# Altium PCB PCB_STM32.PcbDoc
Units mm, origin at the board's own origin, x right, y up, seen from the top; angles counter-clockwise.
Board outline 152.4 x 101.6 mm, 2 copper layers (Top Layer, Bottom Layer); 35 components, 49 nets, 180 pads, 0 vias.
Unrouted connection lines stored in the file: 125.
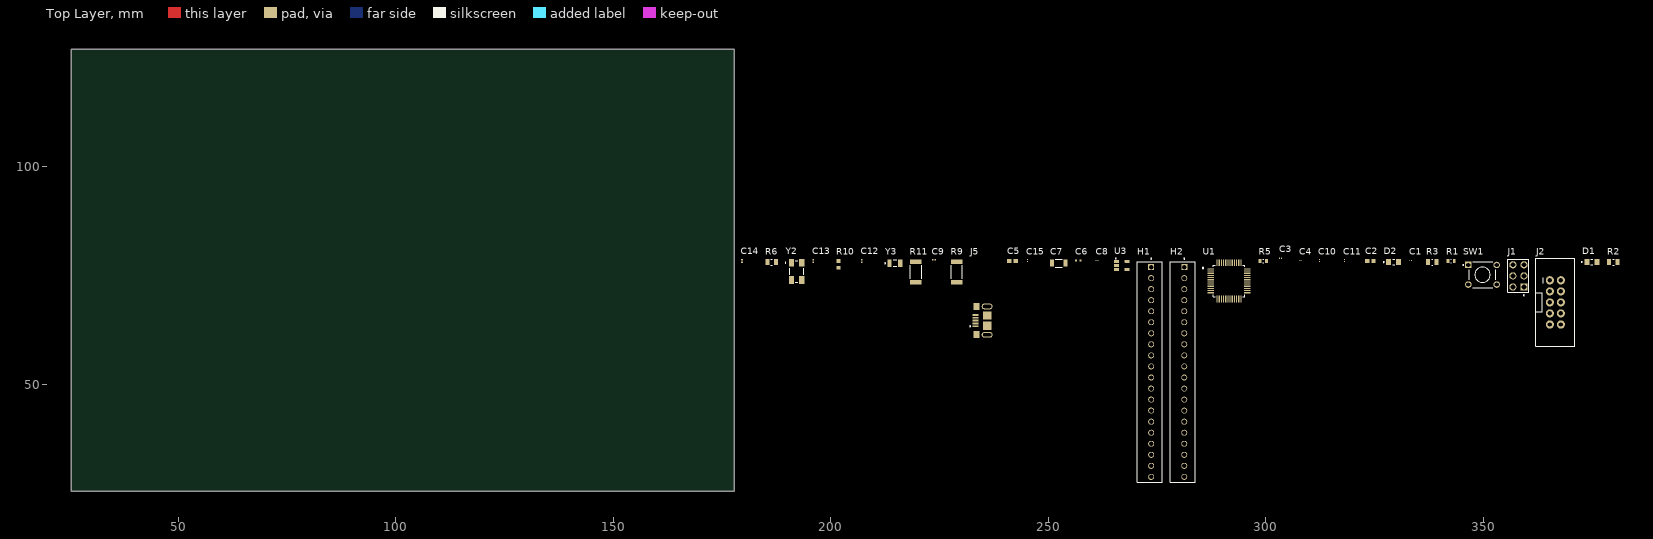
[diagram p0: Top Layer view]
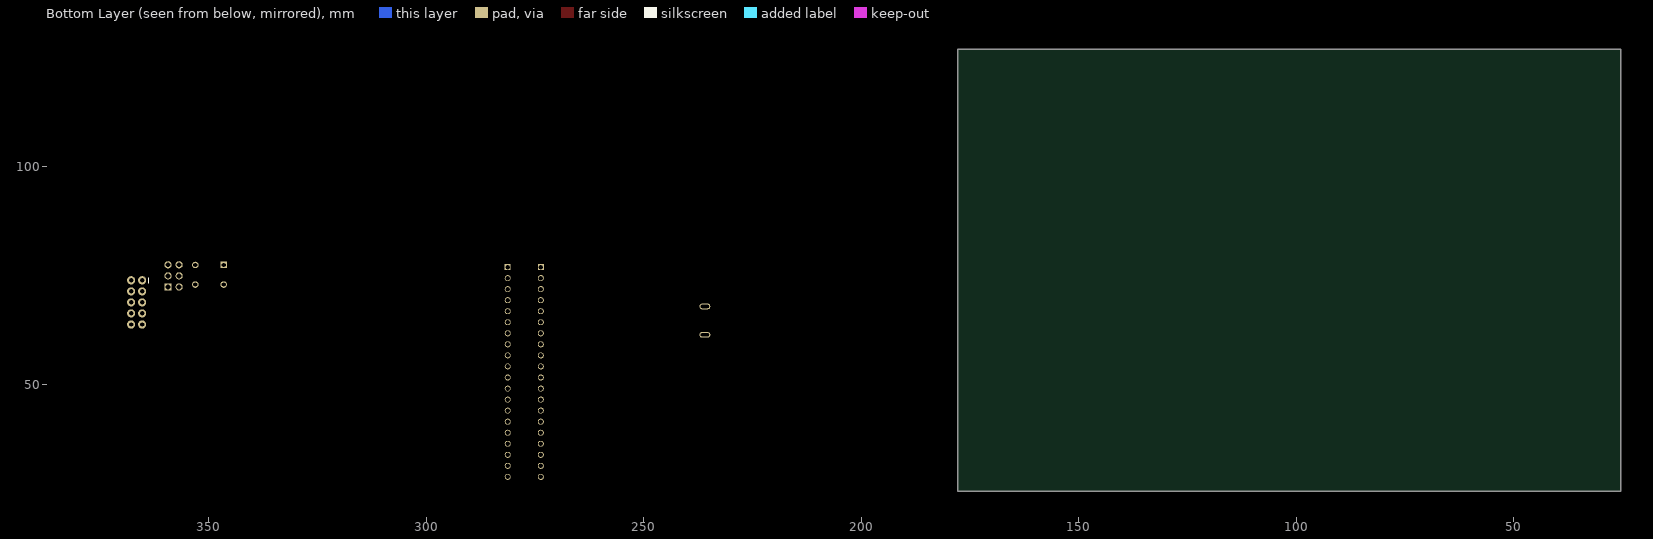
[diagram p1: Bottom Layer view, seen from below]

## Layer stack, top to bottom
Top Solder: solder mask 0.0102, Solder Resist, Dk 3.5
Top Layer: signal copper 0.0356
Dielectric 1: dielectric 0.32, FR-4, Dk 4.8
Bottom Layer: signal copper 0.0356
Bottom Solder: solder mask 0.0102, Solder Resist, Dk 3.5

## Board outline
25.4,25.4 177.8,25.4 177.8,127 25.4,127

## Design rules (kind name [scope] priority, off if disabled: settings)
Clearance [All] p1: gap=0.254 ignorepadtopadclearanceinfootprint=FALSE
PolygonConnect [All] p1: connectstyle=Relief reliefconductorwidth=0.254 reliefentries=4 polygonreliefangle="90 Angle" airgapwidth=0.254
RoutingVias [All] p1: holewidth=0.711 width=1.27 viastyle="Through Hole" minholewidth=0.711 minwidth=1.27 maxholewidth=0.711 maxwidth=1.27
SolderMaskExpansion [All] p1: expansion=0.102 istentingtop=FALSE
SupplyNets "Schematic Supply Nets_3" [InNet('GND')] p1: voltage=0.000
SupplyNets "Schematic Supply Nets_2" [InNet('3.3VCC')] p2: voltage=0.000
SupplyNets "Schematic Supply Nets_1" [InNet('+5')] p3: voltage=0.000
SupplyNets "Schematic Supply Nets" [InNet('VCC')] p4: voltage=0.000
Width [All] p1: maxlimit=0.254 minlimit=0.254 preferedwidth=0.254
30 further rules are at their usual default settings.

## Components (designator, comment, footprint, x,y, rotation, side; value= is the part's Value field where it differs from the comment)
C1 "100nF" WCAP-CSGP_0201_L0.6W0.3H0.3 333.375,78.486 r0 top
C2 "1uF" CAPC1608X55N 324.104,78.359 r0 top
C3 "100nF" WCAP-CSGP_0201_L0.6W0.3H0.3 303.437,78.994 r0 top
C4 "100nF" WCAP-CSGP_0201_L0.6W0.3H0.3 308.102,78.486 r0 top
C5 "1uF" CAPC1608X55N 241.808,78.359 r0 top
C6 "10μF" WCAP-CSGP_0402_L1W0.5H0.5 256.921,78.486 r0 top
C7 "22nF" WCAP-CSGP_1206_L3.2W1.6H1.6 252.476,77.851 r0 top
C8 "100nF" WCAP-CSGP_0201_L0.6W0.3H0.3 261.239,78.486 r0 top
C9 "20p" CAPC0603X33N 223.774,78.613 r0 top
C10 "100nF" WCAP-CSGP_0201_L0.6W0.3H0.3 312.42,78.486 r90 top
C11 "100nF" WCAP-CSGP_0201_L0.6W0.3H0.3 318.135,78.486 r90 top
C12 "20p" CAPC0603X33N 207.137,78.359 r90 top
C13 "20p" CAPC0603X33N 195.961,78.359 r90 top
C14 "20p" CAPC0603X33N 179.578,78.359 r90 top
C15 "100nF" WCAP-CSGP_0201_L0.6W0.3H0.3 245.237,78.486 r90 top
D1 "7012X1" LED_7012X1 375.031,78.105 r0 top
D2 "7012X1" LED_7012X1 329.438,78.105 r0 top
H1 "Header 20" TE_2-640456-0 273.685,76.962 r90 top
H2 "Header 20" TE_2-640456-0 281.305,76.962 r90 top
J1 "67997-106HLF" AMPHENOL_67997-106HLF 358.14,74.93 r90 top
J2 "SWD" ARM-JTAG-10-SWD-IDC 366.649,68.834 r0 top
J5 "2013499-1" TE_2013499-1 235.966,64.643 r90 top
R1 "ERJPA3F5100V" RES_ERJPA3F5100V 342.646,78.359 r0 top
R2 "10k" RESC2012X60N 379.984,78.105 r0 top
R3 "100k" RESC2012X60N 338.328,78.105 r0 top
R5 "ERJPA3F5100V" RES_ERJPA3F5100V 299.466,78.359 r0 top
R6 "1M" RESC2012X60N 186.436,78.105 r0 top
R9 "20R" RESC5025X120N 228.981,75.819 r90 top
R10 "4k7" RESC1608X55N 201.803,77.597 r90 top
R11 "20R" RESC5025X120N 219.583,75.819 r90 top
SW1 "1825910-6" SW_1825910-6-4 349.885,75.184 r0 top
U1 "STM32F103C8T6" QFP50P900X900X160-48N 291.592,73.787 r0 top
U3 "RT9193-33GB" SOT94P279X129-5N 266.954,77.343 r0 top
Y2 "8MHz" XTAL_ABM3B-8.000MHZ-10-1-U-T 192.151,75.946 r0 top
Y3 "32.768K" XTAL_NX3215SA-32.768K-STD-MUA-14 214.757,77.851 r0 top

## Footprints (in the part's own frame and the unit in brackets; to place one, negate y for a bottom-side part, rotate by r counter-clockwise, add the part's x,y. Pads: shape width x height; smd on the part's side, far side on the other; paste and mask are expansions set on the pad)
AMPHENOL_67997-106HLF [mm]
  rect 1.65x1.65 hole 1.1: 01(-2.54,-1.27)
  round 1.65 hole 1.1: 02(-2.54,1.27) 03(0,-1.27) 04(0,1.27) 05(2.54,-1.27) 06(2.54,1.27)
  silkscreen extent -4.56,-2.41 3.81,2.41, body extent -3.81,-2.41 3.81,2.41, height 8.38
ARM-JTAG-10-SWD-IDC [mil]
  round 74 hole 40: GND@1(-50,100) GND@2(-50,0) GND@3(-50,-200) RESET(50,-200) RXI(-50,-100) SWCLK(50,100) SWDIO(50,200) SWO(50,0) TXO(50,-100) VREF(-50,200)
  silkscreen extent -177,-398 177,398
CAPC0603X33N [mm]
  rect 0.38x0.4 smd: 1(-0.281,0) 2(0.281,0)
  body extent -0.3,-0.15 0.3,0.15, height 0.33
CAPC1608X55N [mm]
  rect 1.01x0.93 smd: 1(-0.709,0) 2(0.709,0)
  body extent -0.8,-0.4 0.8,0.4, height 0.55
LED_7012X1 [mm]
  rect 1.15x1.3 smd: A(1.125,0) C(-1.125,0)
  silkscreen extent -2.4,-0.63 0.23,0.63, body extent -0.62,-1 0.62,1, height 0.73
QFP50P900X900X160-48N [mm]
  rrect50% 1.56x0.28 smd: 1(-4.18,2.75) 2(-4.18,2.25) 3(-4.18,1.75) 4(-4.18,1.25) 5(-4.18,0.75) 6(-4.18,0.25) 7(-4.18,-0.25) 8(-4.18,-0.75) 9(-4.18,-1.25) 10(-4.18,-1.75) 11(-4.18,-2.25) 12(-4.18,-2.75) 25(4.18,-2.75) 26(4.18,-2.25) 27(4.18,-1.75) 28(4.18,-1.25) 29(4.18,-0.75) 30(4.18,-0.25) 31(4.18,0.25) 32(4.18,0.75) 33(4.18,1.25) 34(4.18,1.75) 35(4.18,2.25) 36(4.18,2.75)
  rrect50% 0.28x1.56 smd: 13(-2.75,-4.18) 14(-2.25,-4.18) 15(-1.75,-4.18) 16(-1.25,-4.18) 17(-0.75,-4.18) 18(-0.25,-4.18) 19(0.25,-4.18) 20(0.75,-4.18) 21(1.25,-4.18) 22(1.75,-4.18) 23(2.25,-4.18) 24(2.75,-4.18) 37(2.75,4.18) 38(2.25,4.18) 39(1.75,4.18) 40(1.25,4.18) 41(0.75,4.18) 42(0.25,4.18) 43(-0.25,4.18) 44(-0.75,4.18) 45(-1.25,4.18) 46(-1.75,4.18) 47(-2.25,4.18) 48(-2.75,4.18)
  silkscreen extent -6.15,-3.6 3.6,3.6, body extent -4.5,-4.5 4.5,4.5, height 1.6
RES_ERJPA3F5100V [mm]
  rect 0.65x0.9 smd: 1(-0.725,0) 2(0.725,0)
  silkscreen extent -0.08,-0.4 0.08,0.4, body extent -0.8,-0.4 0.8,0.4, height 0.45
RESC1608X55N [mm]
  rect 0.87x0.97 smd: 1(-0.78,0) 2(0.78,0)
  body extent -0.8,-0.4 0.8,0.4, height 0.55
RESC2012X60N [mm]
  rect 0.92x1.38 smd: 1(-0.955,0) 2(0.955,0)
  silkscreen extent -0.17,-0.68 0.17,0.68, body extent -1,-0.63 1,0.63, height 0.6
RESC5025X120N [mm]
  rect 1.07x2.67 smd: 1(-2.38,0) 2(2.38,0)
  silkscreen extent -1.52,-1.32 1.52,1.32
SOT94P279X129-5N [mm]
  rrect12% 1.17x0.67 smd: 1(-1.22,0.94) 2(-1.22,0) 3(-1.22,-0.94) 4(1.22,-0.94) 5(1.22,0.94)
  silkscreen extent -1.47,1.53 -1.33,1.67, body extent -1.4,-1.45 1.4,1.45, height 1.3
SW_1825910-6-4 [mm]
  rect 1.498x1.498 / inner round 1.498 / far side rect 1.498x1.498 hole 0.99: 1(-3.25,2.25)
  round 1.498 hole 0.99: 2(3.25,2.25) 3(-3.25,-2.25) 4(3.25,-2.25)
  silkscreen extent -4.54,-3 3,3, body extent -3,-3.9 3,3.9, height 5.01
TE_2-640456-0 [mm]
  rect 1.37x1.37 / inner round 1.37 / far side rect 1.37x1.37 hole 1.02: 1(0,0)
  round 1.37 hole 1.02: 2(-2.54,0) 3(-5.08,0) 4(-7.62,0) 5(-10.16,0) 6(-12.7,0) 7(-15.24,0) 8(-17.78,0) 9(-20.32,0) 10(-22.86,0) 11(-25.4,0) 12(-27.94,0) 13(-30.48,0) 14(-33.02,0) 15(-35.56,0) 16(-38.1,0) 17(-40.64,0) 18(-43.18,0) 19(-45.72,0) 20(-48.26,0)
  silkscreen extent -49.53,-2.54 2.02,3.18, body extent -49.53,-2.54 1.27,3.17, height 10.03
TE_2013499-1 [mm]
  rect 0.4x1.35 smd: 1(-1.3,2.675) 2(-0.65,2.675) 3(0,2.675) 4(0.65,2.675) 5(1.3,2.675)
  rect 1.6x1.4 smd: SH1(-3.2,2.45) SH4(3.2,2.45)
  rect 1.9x1.9 smd: SH2(-1.2,0) SH3(1.2,0)
  oval 1.31x2.5 hole 0.71 slot 1.9 at 90 deg: SH5(3.255,0) SH6(-3.255,0)
  silkscreen extent -1.4,3.8 -1.2,4, body extent -4,-2.49 4,3.11, height 2.76
WCAP-CSGP_0201_L0.6W0.3H0.3 [mm] "Ceramic Capacitors, body 0.60x0.30mm"
  rect 0.21x0.3 smd: 1(-0.22,0) 2(0.22,0)
  body extent -0.3,-0.15 0.3,0.15, height 0.3
WCAP-CSGP_0402_L1W0.5H0.5 [mm] "Ceramic Capacitors, body 1x0.5mm"
  rect 0.5x0.5 smd: 1(-0.5,0) 2(0.5,0)
  body extent -0.5,-0.25 0.5,0.25, height 0.5
WCAP-CSGP_1206_L3.2W1.6H1.6 [mm] "Ceramic Capacitors, body 3.2x1.6mm"
  rect 0.9x1.6 smd: 1(-1.55,0) 2(1.55,0)
  silkscreen extent -0.8,-0.95 0.8,0.95, body extent -1.6,-0.8 1.6,0.8, height 1.6
XTAL_ABM3B-8.000MHZ-10-1-U-T [mm]
  rect 1.2x1.8 smd: 1(-1.2,2) 2(-1.2,-2) 3(1.2,-2) 4(1.2,2)
  silkscreen extent -2.65,-2.5 1.6,2.5, body extent -1.58,-2.5 1.6,2.5, height 1.1
XTAL_NX3215SA-32.768K-STD-MUA-14 [mm]
  rect 1x1.8 smd: 1(-1.25,0) 2(1.25,0)
  silkscreen extent -2.35,-0.75 0.43,0.75

## Part data
C1 C3 C4 C8 C10 C11: library part C2012X7R1H104K085AA, "0.1 ÂµF Â±10% 50V Ceramic Capacitor X7R 0805 (2012 Metric)", Package="2012 TDK", Check_prices=https://www.snapeda.com/parts/C2012X7R1H104K085AA/TDK/view-part/?ref=eda, Digi-Key_Part_Number=445-7534-1-ND, MF=TDK, MP=C2012X7R1H104K085AA, Purchase-URL=https://pricing.snapeda.com/search/part/C2012X7R1H104K085AA/?ref=eda, SnapEDA_Link=https://www.snapeda.com/parts/C2012X7R1H104K085AA/TDK/view-part/?ref=snap
C2 C5: library part CGB3B3X6S1A105K055AB, "Cap Ceramic 1uF 10V X6S 10% SMD 0603 105Â°C Punched Paper T/R", Package="1608 TDK", Check_prices=https://www.snapeda.com/parts/CGB3B3X6S1A105K055AB/TDK/view-part/?ref=eda, MF=TDK, MP=CGB3B3X6S1A105K055AB, SnapEDA_Link=https://www.snapeda.com/parts/CGB3B3X6S1A105K055AB/TDK/view-part/?ref=snap
C6: library part C2012X5R1C106M085AC, "10ÂµF Â±20% 16V Ceramic Capacitor X5R 0805 (2012 Metric)", Package="2012 TDK", Availability="In Stock", Check_prices=https://www.snapeda.com/parts/C2012X5R1C106M085AC/TDK/view-part/?ref=eda, MF=TDK, MP=C2012X5R1C106M085AC, Price=None, Purchase-URL=https://pricing.snapeda.com/search/part/C2012X5R1C106M085AC/?ref=eda, SnapEDA_Link=https://www.snapeda.com/parts/C2012X5R1C106M085AC/TDK/view-part/?ref=snap
C7: library part 885012008009, "WCAP-CSGP Multilayer Ceramic Chip Capacitor, General Purpose, size 1206, NP0, 22nF, 10V", Capacitance Tolerance=+/-5%, Case/Size Code=1206, Insulation Resistance=10GΩ, Manufacturer="Wurth Elektronik", Max Operating Temperature=125°C, Min Operating Temperature=-55°C, Rated Voltage (DC)=10V, Capacitance=22nF, Category="Multilayer Ceramic Chip Capacitors", Ceramic Type=NP0, ComponentLink1Description="Website Link", ComponentLink1URL=https://www.we-online.com/redexpert/article/885012008009?ad, ComponentLink2Description="Datasheet Link", ComponentLink2URL=https://www.we-online.com/redexpert/spec/885012008009?ad, Height=1.6mm, Length=3.2mm, Manufacturer Part Number=885012008009, Match Code=WCAP-CSGP, Mount="Surface Mount", Packaging="Tape and Reel", Q Factor=1000, Technical Reference=NP01206223J010DFCT10000, Width=1.6mm
C9 C12 C13 C14: library part GRM0335C1H200JA01D, "SMD capacitor C0G(EIA) with capacitance 20pF Tol.5%. Rated voltage 50Vdc 125C", Package="0603 Murata", Check_prices=https://www.snapeda.com/parts/GRM0335C1H200JA01D/Murata+Electronics+North+America/view-part/?ref=eda, MF="Murata Electronics", MP=GRM0335C1H200JA01D, SnapEDA_Link=https://www.snapeda.com/parts/GRM0335C1H200JA01D/Murata+Electronics+North+America/view-part/?ref=snap
C15: library part 885012104001, "WCAP-CSGP Multilayer Ceramic Chip Capacitor, General Purpose, size 0201, X5R Class II, 100nF, 16V", Capacitance Tolerance=+/-10%, Case/Size Code=0201, Insulation Resistance=1GΩ, Manufacturer="Wurth Elektronik", Max Operating Temperature=85°C, Min Operating Temperature=-55°C, Rated Voltage (DC)=16V, Capacitance=100nF, Category="Multilayer Ceramic Chip Capacitors", Ceramic Type="X5R Class II", ComponentLink1Description="Website Link", ComponentLink1URL=https://www.we-online.com/redexpert/article/885012104001?ad, ComponentLink2Description="Datasheet Link", ComponentLink2URL=https://www.we-online.com/redexpert/spec/885012104001?ad, Dissipation Factor=10%, Height=0.3mm, Length=0.6mm, Manufacturer Part Number=885012104001, Match Code=WCAP-CSGP, Mount="Surface Mount", Packaging="Tape and Reel", Technical Reference=X5R0201104K016DFCT10000, Width=0.3mm
D1 D2: "Red - LED Indication - Discrete 1.7V 0805 (2012 Metric)", Package="0805 Visual Communications", Availability="In Stock", Check_prices=https://www.snapeda.com/parts/7012X1/Visual+Communications/view-part/?ref=eda, MF=VCC, MP=7012X1, Price=None, Purchase-URL=https://pricing.snapeda.com/search/part/7012X1/?ref=eda, SnapEDA_Link=https://www.snapeda.com/parts/7012X1/Visual+Communications/view-part/?ref=snap
H1 H2: library part 2-640456-0, "Header Friction Lock MTA-100 20 250VAC Polyester Tin Copper Alloy Tin", Package=None, Centerline_Pitch="2.54 mm[.1 in]", Check_prices=https://www.snapeda.com/parts/2-640456-0/TE+Connectivity+AMP+Connectors/view-part/?ref=eda, EU_RoHS_Compliance=Compliant, MF="TE Connectivity", MP=2-640456-0, Number_of_Positions=20, Product_Type=Connector, SnapEDA_Link=https://www.snapeda.com/parts/2-640456-0/TE+Connectivity+AMP+Connectors/view-part/?ref=snap
J1: "BergStikÂ®, Board to Board connector, Unshrouded vertical header, Through Hole, Double Row, 6 Positions, 2.54 mm (0.100in) Pitch", Package=None, Availability="In Stock", Check_prices=https://www.snapeda.com/parts/67997-106HLF/Amphenol+FCI/view-part/?ref=eda, MF="Amphenol ICC", MP=67997-106HLF, Price=None, Purchase-URL=https://pricing.snapeda.com/search/part/67997-106HLF/?ref=eda, SnapEDA_Link=https://www.snapeda.com/parts/67997-106HLF/Amphenol+FCI/view-part/?ref=snap
J2: library part ARM-JTAG-SWD, "DEBUG ADAPTER FOR ARM-USB-TINY-H", Package=None, Availability="In Stock", Check_prices=https://www.snapeda.com/parts/ARM-JTAG-SWD/Olimex+LTD/view-part/?ref=eda, MF="Olimex LTD", MP=ARM-JTAG-SWD, Price=None, Purchase-URL=https://pricing.snapeda.com/search/part/ARM-JTAG-SWD/?ref=eda, SnapEDA_Link=https://www.snapeda.com/parts/ARM-JTAG-SWD/Olimex+LTD/view-part/?ref=snap
J5: Package=None, Availability=Unavailable, MP=2013499-1, Price=None
R1 R5: "RES, THICK FILM, 510R, 1%, 0.25W, 0603", Package="1608-2 Panasonic", Check_prices=https://www.snapeda.com/parts/ERJ-PA3F5100V/Panasonic/view-part/?ref=eda, MF=Panasonic, MP=ERJ-PA3F5100V, SnapEDA_Link=https://www.snapeda.com/parts/ERJ-PA3F5100V/Panasonic/view-part/?ref=snap
R2: library part RC0805FR-0710KL, "10 kOhms Â±1% 0.125W, 1/8W Chip Resistor 0805 (2012 Metric) Moisture Resistant Thick Film", Package="2012 Rohm Semiconductor", Availability="In Stock", Check_prices=https://www.snapeda.com/parts/RC0805FR-0710KL/Yageo/view-part/?ref=eda, MF=Yageo, MP=RC0805FR-0710KL, Price=None, Purchase-URL=https://pricing.snapeda.com/search/part/RC0805FR-0710KL/?ref=eda, SnapEDA_Link=https://www.snapeda.com/parts/RC0805FR-0710KL/Yageo/view-part/?ref=snap
R3: library part RC0805FR-07100KL, "100 kOhms Â±1% 0.125W, 1/8W Chip Resistor 0805 (2012 Metric) Moisture Resistant Thick Film", Package="2012 Yageo", Check_prices=https://www.snapeda.com/parts/RC0805FR-07100KL/Yageo/view-part/?ref=eda, MF=Yageo, MP=RC0805FR-07100KL, SnapEDA_Link=https://www.snapeda.com/parts/RC0805FR-07100KL/Yageo/view-part/?ref=snap
R6: library part RC0805FR-071ML, "1 MOhms Â±1% 0.125W, 1/8W Chip Resistor 0805 (2012 Metric) Moisture Resistant Thick Film", Package="2012 Yageo", Check_prices=https://www.snapeda.com/parts/RC0805FR-071ML/Yageo/view-part/?ref=eda, MF=Yageo, MP=RC0805FR-071ML, SnapEDA_Link=https://www.snapeda.com/parts/RC0805FR-071ML/Yageo/view-part/?ref=snap
R9 R11: library part 3-2176397-2, Package=None, Availability=Unavailable, MP=3-2176397-2, Price=None
R10: library part CRG0603F4K7, "Resistor, Thick Film, Res 4.7 Kilohms, Pwr-Rtg 0.1 W, Tol 1%, SMT, 0603", Package=0603, Power_Rating=".1 W", Resistance=4.7K, Tolerance=1%, Voltage_Rating="50 V", Check_prices=https://www.snapeda.com/parts/CRG0603F4K7/TE+Connectivity+Passive+Product/view-part/?ref=eda, EU_RoHS_Compliance="Compliant with Exemptions", MF="TE Connectivity", MP=CRG0603F4K7, SnapEDA_Link=https://www.snapeda.com/parts/CRG0603F4K7/TE+Connectivity+Passive+Product/view-part/?ref=snap
SW1: "Switch Push Button OFF (ON) SPST Round Button 0.05A 24VDC Momentary Contact PC Pins Thru-Hole", Package=None, Check_prices=https://www.snapeda.com/parts/1825910-6/TE+Connectivity+ALCOSWITCH+Switches/view-part/?ref=eda, Digi-Key_Part_Number=450-1650-ND, MF="TE Connectivity", MP=1825910-6, Purchase-URL=https://pricing.snapeda.com/search/part/1825910-6/?ref=eda, SnapEDA_Link=https://www.snapeda.com/parts/1825910-6/TE+Connectivity+ALCOSWITCH+Switches/view-part/?ref=snap
U1: library part CMP-0237-00215-3, "ARM Cortex-M3 32-bit MCU, 64 KB Flash, 20 KB Internal RAM, 37 I/Os, 48-pin LQFP, -40 to 85 degC, Tray", I/Os (High Current)=37, Operating Frequency(F) (Processor speed) (MHz)=72, Supply Voltage(Vcc) min (V)=2, A/D Converter="2x12-bit (10 Channel)", ComponentLink1Description="Manufacturer URL", ComponentLink1URL=http://www.st.com/web/en/home.html, ComponentLink2Description=Datasheet, ComponentLink2URL=http://www.st.com/st-web-ui/static/active/en/resource/technical/document/datasheet/CD00161566.pdf, ComponentLink3Description="Package Specification", ComponentLink3URL=http://www.st.com/st-web-ui/static/active/en/resource/technical/document/datasheet/DM00058181.pdf, Core="ARM Cortex-M3", DatasheetVersion="Rev. 16", FLASH Size (Prog) (kB)=64, Internal RAM Size (kB)=20, Mounting Technology="Surface Mount", PackageDescription="48-Pin Low Profile Quad Flat Package, 7 x 7 mm Body, 0.5 mm Pitch", PackageReference=LQFP48, PackageVersion="Rev. 6, 06/2013", Packing=Tray, PartNumber=STM32F103C8T6
U3: "Linear Voltage Regulator IC Positive Fixed 1 Output 300mA TSOT-23-5", Package="SOT-23-5 Richtek", Check_prices=https://www.snapeda.com/parts/RT9193-33GB/Richtek+USA+Inc./view-part/?ref=eda, Digi-Key_Part_Number=1028-1014-2-ND, MF="Richtek USA", MP=RT9193-33GB, Purchase-URL=https://pricing.snapeda.com/search/part/RT9193-33GB/?ref=eda, SnapEDA_Link=https://www.snapeda.com/parts/RT9193-33GB/Richtek+USA+Inc./view-part/?ref=snap
Y2: library part ABM3B-8.000MHZ-10-1-U-T, "8 MHz Â±10ppm Crystal 10pF 200 Ohms 4-SMD, No Lead", Package="SMD-4 Abracon LLC", Check_prices=https://www.snapeda.com/parts/ABM3B-8.000MHZ-10-1-U-T/Abracon/view-part/?ref=eda, MF=Abracon, MP=ABM3B-8.000MHZ-10-1-U-T, SnapEDA_Link=https://www.snapeda.com/parts/ABM3B-8.000MHZ-10-1-U-T/Abracon/view-part/?ref=snap
Y3: library part NX3215SA-32.768K-STD-MUA-14, "32.768kHz Â±20ppm Crystal 6pF 70 kOhms 2-SMD, No Lead  MANUFACTURER: NIHON DEMPA KOGYO", Package=None, Availability=Unavailable, MP=NX3215SA-32.768K-STD-MUA-14, Price=None

## Nets (pads, with @x,y where several pads share a name; then routed paths per layer and width w, separated by ;. In a path a pad name is that pad's centre, name@x,y a point inside that pad or via, vN(x,y) a via of type N, cw(c..) or ccw(c..) an arc to the next point about the centre after c; other vN are vias at no path point)
3.3VCC: C1.2 C3.2 C4.2 C10.2 C11.2 H1.18 H2.1 J1.01 J1.02 J2.VREF R2.1 U1.9 U1.24 U1.36 U1.48
+5: C5.1 C15.2 H2.3 J5.1 U3.1 U3.3
BOOT0: R3.1 U1.44
GND: C1.1 C2.2 C3.1 C4.1 C5.2 C6.1 C7.1 C8.1 C9.1 C10.1 C11.1 C12.1 C13.1 C14.1 C15.1 H1.19 H1.20 H2.2 J1.05 J1.06 J2.GND@1 J2.GND@2 J2.GND@3 J5.4 J5.5 J5.SH1 J5.SH2 J5.SH3 J5.SH4 J5.SH5 J5.SH6 R1.2 R10.1 SW1.1 SW1.2 U1.8 U1.23 U1.35 U1.47 U3.2 Y2.2 Y2.4
NetC7_2: C7.2 U3.4
NetD1_C: D1.C R1.1
NetD2_C: D2.C R5.1
NetJ1_03: J1.03 R3.2
NetJ5_2: J5.2 R9.2
NetJ5_3: J5.3 R11.2
OSCIN: C13.2 R6.2 U1.5 Y2.1
OSCOUT: C14.2 R6.1 U1.6 Y2.3
PA0: H1.5 U1.10
PA1: H1.6 U1.11
PA2: H1.7 U1.12
PA3: H1.8 U1.13
PA4: H1.9 U1.14
PA5: H1.10 U1.15
PA6: H1.11 U1.16
PA7: H1.12 U1.17
PA8: H2.16 U1.29
PA9: H2.15 U1.30
PA10: H2.14 U1.31
PA11: H2.13 R9.1 U1.32
PA12: H2.12 R10.2 R11.1 U1.33
PA15: H2.11 U1.38
PB0: H1.13 U1.18
PB1: H1.14 U1.19
PB3: H2.10 U1.39
PB4: H2.9 U1.40
PB5: H2.8 U1.41
PB6: H2.7 U1.42
PB7: H2.6 U1.43
PB8: H2.5 U1.45
PB9: H2.4 U1.46
PB10: H1.15 U1.21
PB11: H1.16 U1.22
PB12: H2.20 U1.25
PB13: H2.19 U1.26
PB14: H2.18 U1.27
PB15: H2.17 U1.28
PC13: H1.2 R5.2 U1.2
PC14: C9.2 H1.3 U1.3 Y3.1
PC15: C12.2 H1.4 U1.4 Y3.2
RESET: C2.1 H1.17 R2.2 SW1.3 SW1.4 U1.7
SWCLK: J2.SWCLK U1.37
SWDIO: J2.SWDIO U1.34
VBAT: H1.1 U1.1
VCC: C6.2 C8.2 D1.A D2.A U3.5
pads on no net: J1.04 J2.RESET J2.RXI J2.SWO J2.TXO U1.20

## Text inside footprints (layer, text, board x,y; h text height)
J5: Top 3D Body "PCB EDGE" at 237.116,69.093 h1.27 r90